# Altium PCB FPv1.3.2.PcbDoc (part 7 of 9)
Units mm, origin at the board's own origin, x right, y up, seen from the top; angles counter-clockwise.
Board outline 81.28 x 53.34 mm, 4 copper layers (Top Layer, GROUND PLANE, POWER PLANE, Bottom Layer); 98 components, 183 nets, 614 pads, 312 vias.
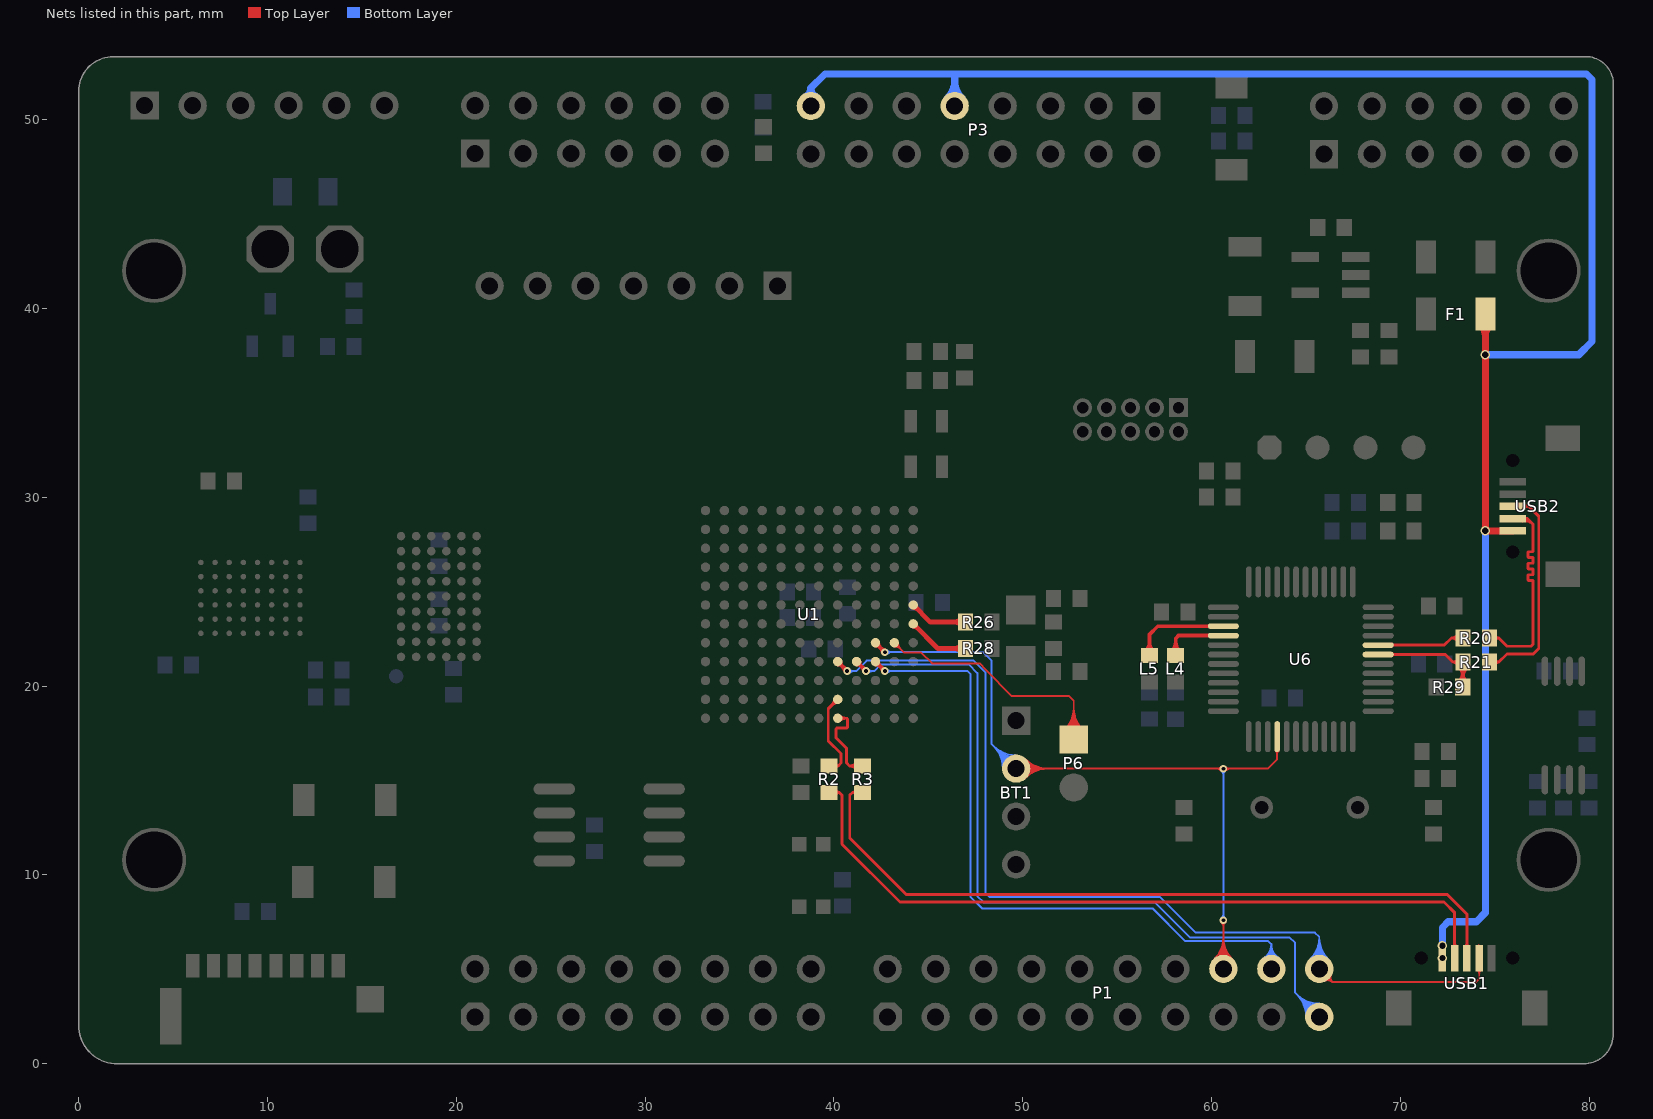
[diagram p9: the nets of this part, all layers, seen from the top]

## Via types
v1: diameter 0.403, hole 0.2, Top Layer to Bottom Layer, tented both sides, 261 vias
v2: diameter 0.503, hole 0.3, Top Layer to Bottom Layer, tented both sides, 25 vias
v3: diameter 0.6, hole 0.4, Top Layer to Bottom Layer, tented both sides, 11 vias
v4: diameter 0.508, hole 0.33, Top Layer to Bottom Layer, tented both sides, 5 vias
v5: diameter 0.703, hole 0.4, Top Layer to Bottom Layer, tented both sides, 3 vias
v6: diameter 0.603, hole 0.4, Top Layer to Bottom Layer, tented both sides, 2 vias
v7: diameter 0.503, hole 0.25, Top Layer to Bottom Layer, tented both sides, 2 vias
v8: diameter 0.6, hole 0.24, Top Layer to Bottom Layer, tented both sides, 1 vias
v9: diameter 0.508, hole 0.349, Top Layer to Bottom Layer, tented both sides, 1 vias
v10: diameter 0.603, hole 0.3, Top Layer to Bottom Layer, tented both sides, 1 vias

## Nets (pads, with @x,y where several pads share a name; then routed paths per layer and width w, separated by ;. In a path a pad name is that pad's centre, name@x,y a point inside that pad or via, vN(x,y) a via of type N, cw(c..) or ccw(c..) an arc to the next point about the centre after c; other vN are vias at no path point) (continued)
PTE25: BT1.2 P1.16 U1.K5 U6.40 | length 70.9
  Top Layer w0.102: U1.K5@42.2,22.101 cw(c42.2,21.62) 42.54,21.96 cw(c42.88,22.3) U1.K5@42.399,22.3 ; U1.K5@42.2,22.3 v1(42.7,21.8) ; U1.K5@42.295,22.101 cw(c42.018,21.621) v1@42.554,21.762 ; U1.K5@42.399,22.205 ccw(c42.879,22.482) v1@42.738,21.946 ; 42.506,21.98 cw(c42.349,21.708) v1@42.653,21.788 ; 42.511,21.977 cw(c42.458,21.885) v1@42.558,21.85 ; 42.52,21.994 ccw(c42.792,22.151) v1@42.712,21.847 ; 42.523,21.989 ccw(c42.615,22.042) v1@42.65,21.942 ; v1@42.549,21.8 ccw(c42.185,21.8) 42.443,22.057 ccw(c42.7,22.315) v1@42.7,21.951 ; BT1.2@49.65,15.46 49.825,15.635 62.985,15.635 63.475,16.125 U6.40@63.475,17.325 ; BT1.2@49.929,15.356 cw(c50.602,14.683) 50.602,15.635 cw(c50.602,16.587) BT1.2@49.929,15.914 ; BT1.2@50.001,15.284 cw(c50.847,14.438) 50.847,15.635 cw(c50.847,16.832) BT1.2@50.001,15.986 ; BT1.2@50.073,15.212 cw(c51.093,14.192) 51.093,15.635 cw(c51.093,17.078) BT1.2@50.073,16.058 ; BT1.2@50.144,15.141 cw(c51.338,13.947) 51.338,15.635 cw(c51.338,17.323) BT1.2@50.144,16.129 ; P1.16@60.131,5.519 ccw(c58.937,6.713) 60.625,6.713 ccw(c62.313,6.713) P1.16@61.119,5.519 ; P1.16@60.202,5.448 ccw(c59.182,6.468) 60.625,6.468 ccw(c62.068,6.468) P1.16@61.048,5.448 ; 60.237,15.635 cw(c60.237,15.237) v1@60.518,15.518 ; P1.16@60.274,5.376 ccw(c59.428,6.222) 60.625,6.222 ccw(c61.822,6.222) P1.16@60.976,5.376 ; 60.285,15.635 ccw(c60.285,15.965) v1@60.518,15.732 ; P1.16@60.346,5.304 ccw(c59.673,5.977) 60.625,5.977 ccw(c61.577,5.977) P1.16@60.904,5.304 ; v1@60.518,7.493 cw(c60.261,7.236) 60.625,7.236 cw(c60.989,7.236) v1@60.732,7.493 ; P1.16@60.625,5.025 v1(60.625,7.6) ; v1@60.732,15.518 cw(c61.013,15.237) 61.013,15.635 ; v1@60.732,15.732 ccw(c60.965,15.965) 60.965,15.635 ; U6.40@63.405,16.58 cw(c63.236,16.411) 63.475,16.411 cw(c63.714,16.411) U6.40@63.545,16.58 ; 42.537,21.962 ccw(c42.619,22.104) 42.661,21.946 cw(c42.619,22.104) 42.537,21.962 ; 42.538,21.963 cw(c42.396,21.881) 42.554,21.839 ccw(c42.396,21.881) 42.538,21.963
  Bottom Layer w0.102: v1(42.7,21.8) 47.898,21.8 48.35,21.348 48.35,16.935 BT1.2@49.65,15.635 ; v1@42.807,21.693 cw(c43.064,21.436) 43.064,21.8 cw(c43.064,22.164) v1@42.807,21.907 ; BT1.2@48.951,15.635 ccw(c47.263,15.635) 48.456,16.829 ccw(c49.65,18.022) BT1.2@49.65,16.334 ; BT1.2@49.052,15.635 ccw(c47.61,15.635) 48.63,16.655 ccw(c49.65,17.675) BT1.2@49.65,16.233 ; BT1.2@49.154,15.635 ccw(c47.957,15.635) 48.803,16.482 ccw(c49.65,17.328) BT1.2@49.65,16.131 ; BT1.2@49.256,15.635 ccw(c48.303,15.635) 48.977,16.308 ccw(c49.65,16.982) BT1.2@49.65,16.029 ; v1@60.518,7.707 ccw(c60.261,7.964) 60.625,7.964 ccw(c60.989,7.964) v1@60.732,7.707 ; v1@60.518,15.518 cw(c60.261,15.261) 60.625,15.261 cw(c60.989,15.261) v1@60.732,15.518 ; v1(60.625,7.6) v1(60.625,15.625)
PTE26: P1.18 U1.K4 | length 43.9
  Top Layer w0.102: U1.K4@42.2,21.101 cw(c42.2,20.62) 42.54,20.96 cw(c42.88,21.3) U1.K4@42.399,21.3 ; U1.K4@42.2,21.3 v1(42.7,20.8) ; U1.K4@42.295,21.101 cw(c42.018,20.621) v1@42.554,20.762 ; U1.K4@42.399,21.205 ccw(c42.879,21.482) v1@42.738,20.946 ; 42.506,20.98 cw(c42.349,20.708) v1@42.653,20.788 ; 42.511,20.977 cw(c42.458,20.885) v1@42.558,20.85 ; 42.52,20.994 ccw(c42.792,21.151) v1@42.712,20.847 ; 42.523,20.989 ccw(c42.615,21.042) v1@42.65,20.942 ; v1@42.549,20.8 ccw(c42.185,20.8) 42.443,21.057 ccw(c42.7,21.315) v1@42.7,20.951 ; 42.537,20.962 ccw(c42.619,21.104) 42.661,20.946 cw(c42.619,21.104) 42.537,20.962 ; 42.538,20.963 cw(c42.396,20.881) 42.554,20.839 ccw(c42.396,20.881) 42.538,20.963
  Bottom Layer w0.102: v1(42.7,20.8) 47.081,20.8 47.225,20.656 47.225,8.85 47.85,8.225 56.875,8.225 58.603,6.497 63.003,6.497 63.165,6.335 ; v1@42.807,20.693 cw(c43.064,20.436) 43.064,20.8 cw(c43.064,21.164) v1@42.807,20.907 ; P1.18@62.776,5.606 ccw(c62.288,6.335) 63.165,6.335 ; P1.18@62.832,5.521 ccw(c62.415,6.145) 63.165,6.145 ccw(c63.915,6.145) P1.18@63.498,5.521 ; P1.18@62.889,5.437 ccw(c62.543,5.954) 63.165,5.954 ccw(c63.787,5.954) P1.18@63.441,5.437 ; P1.18@63.165,5.025 63.165,6.335 ; P1.18@63.554,5.606 cw(c64.042,6.335) 63.165,6.335
PTE27: P1.19 U1.J4 | length 53.4
  Top Layer w0.102: U1.J4@41.2,21.101 cw(c41.2,20.62) 41.54,20.96 cw(c41.88,21.3) U1.J4@41.399,21.3 ; U1.J4@41.2,21.3 v1(41.7,20.8) ; U1.J4@41.295,21.101 cw(c41.018,20.621) v1@41.554,20.762 ; U1.J4@41.399,21.205 ccw(c41.879,21.482) v1@41.738,20.946 ; 41.506,20.98 cw(c41.349,20.708) v1@41.653,20.788 ; 41.511,20.977 cw(c41.458,20.885) v1@41.558,20.85 ; 41.52,20.994 ccw(c41.792,21.151) v1@41.712,20.847 ; 41.523,20.989 ccw(c41.615,21.042) v1@41.65,20.942 ; v1@41.549,20.8 ccw(c41.185,20.8) 41.443,21.057 ccw(c41.7,21.315) v1@41.7,20.951 ; 41.537,20.962 ccw(c41.619,21.104) 41.661,20.946 cw(c41.619,21.104) 41.537,20.962 ; 41.538,20.963 cw(c41.396,20.881) 41.554,20.839 ccw(c41.396,20.881) 41.538,20.963
  Bottom Layer w0.102: v1(41.7,20.8) 42.136,20.8 42.49,21.154 47.138,21.154 47.6,20.692 47.6,8.875 47.925,8.55 57,8.55 58.85,6.7 64.125,6.7 64.425,6.4 64.425,3.765 P1.19@65.705,2.485 ; v1@41.807,20.693 cw(c42.064,20.436) 42.064,20.8 cw(c42.064,21.164) v1@41.807,20.907 ; P1.19@65.006,2.485 ccw(c63.318,2.485) 64.511,3.679 ccw(c65.705,4.872) P1.19@65.705,3.184 ; P1.19@65.107,2.485 ccw(c63.665,2.485) 64.685,3.505 ccw(c65.705,4.525) P1.19@65.705,3.083 ; P1.19@65.209,2.485 ccw(c64.012,2.485) 64.858,3.332 ccw(c65.705,4.178) P1.19@65.705,2.981 ; P1.19@65.311,2.485 ccw(c64.358,2.485) 65.032,3.158 ccw(c65.705,3.832) P1.19@65.705,2.879
PTE28: P1.20 U1.H4 USB1.4 | length 65.7
  Top Layer w0.102: U1.H4@40.2,21.101 cw(c40.2,20.62) 40.54,20.96 cw(c40.88,21.3) U1.H4@40.399,21.3 ; U1.H4@40.2,21.3 v1(40.7,20.8) ; U1.H4@40.295,21.101 cw(c40.018,20.621) v1@40.554,20.762 ; U1.H4@40.399,21.205 ccw(c40.879,21.482) v1@40.738,20.946 ; 40.506,20.98 cw(c40.349,20.708) v1@40.653,20.788 ; 40.511,20.977 cw(c40.458,20.885) v1@40.558,20.85 ; 40.52,20.994 ccw(c40.792,21.151) v1@40.712,20.847 ; 40.523,20.989 ccw(c40.615,21.042) v1@40.65,20.942 ; v1@40.549,20.8 ccw(c40.185,20.8) 40.443,21.057 ccw(c40.7,21.315) v1@40.7,20.951 ; P1.20@65.705,5.025 66.405,4.325 ; P1.20@65.962,4.485 cw(c66.091,4.215) 66.303,4.427 cw(c66.515,4.639) P1.20@66.245,4.768 ; P1.20@66.006,4.394 cw(c66.157,4.077) 66.405,4.325 ; P1.20@66.336,4.724 ccw(c66.653,4.573) 66.405,4.325 ; USB1.4@74.069,4.995 cw(c73.815,4.74) 74.175,4.74 cw(c74.535,4.74) USB1.4@74.28,4.995 ; USB1.4@74.15,5.6 74.15,6.3 ; USB1.4@74.175,5.6 74.175,4.5 74,4.325 66.405,4.325 ; 40.537,20.962 ccw(c40.619,21.104) 40.661,20.946 cw(c40.619,21.104) 40.537,20.962 ; 40.538,20.963 cw(c40.396,20.881) 40.554,20.839 ccw(c40.396,20.881) 40.538,20.963
  Bottom Layer w0.102: v1(40.7,20.8) 41.171,20.8 41.728,21.357 47.401,21.357 48.025,20.733 48.025,9.05 48.25,8.825 57.275,8.825 59.15,6.95 65.475,6.95 65.705,6.72 P1.20@65.705,5.025 ; v1@40.807,20.693 cw(c41.064,20.436) 41.064,20.8 cw(c41.064,21.164) v1@40.807,20.907 ; P1.20@65.211,5.519 ccw(c64.017,6.713) 65.705,6.713 ccw(c67.393,6.713) P1.20@66.199,5.519 ; P1.20@65.282,5.448 ccw(c64.262,6.468) 65.705,6.468 ccw(c67.148,6.468) P1.20@66.128,5.448 ; P1.20@65.354,5.376 ccw(c64.508,6.222) 65.705,6.222 ccw(c66.902,6.222) P1.20@66.056,5.376 ; P1.20@65.426,5.304 ccw(c64.753,5.977) 65.705,5.977 ccw(c66.657,5.977) P1.20@65.984,5.304
RTC_WAKE: P6.1 U1.L5 | length 21.9
  Top Layer w0.102: U1.L5@43.2,22.101 cw(c43.2,21.62) 43.54,21.96 cw(c43.88,22.3) U1.L5@43.399,22.3 ; U1.L5@43.2,22.3 43.725,21.775 44.625,21.775 45.2,21.2 47.712,21.2 48.032,20.88 48.032,20.868 49.425,19.475 52.45,19.475 52.7,19.225 P6.1@52.7,17.175 ; P6.1@52.206,17.669 ccw(c51.012,18.863) 52.7,18.863 ccw(c54.388,18.863) P6.1@53.194,17.669 ; P6.1@52.277,17.598 ccw(c51.257,18.618) 52.7,18.618 ccw(c54.143,18.618) P6.1@53.123,17.598 ; P6.1@52.349,17.526 ccw(c51.503,18.372) 52.7,18.372 ccw(c53.897,18.372) P6.1@53.051,17.526 ; P6.1@52.421,17.454 ccw(c51.748,18.127) 52.7,18.127 ccw(c53.652,18.127) P6.1@52.979,17.454
RTCX1: R28.2 U1.M6 | length 4.8
  Top Layer w0.254: U1.M6@44.2,23.177 cw(c44.2,22.88) 44.41,23.09 cw(c44.62,23.3) U1.M6@44.323,23.3 ; U1.M6@44.2,23.3 45.505,21.995 R28.2@46.979,21.995 ; R28.2@46.786,21.802 ccw(c46.32,21.336) 46.32,21.995 ccw(c46.32,22.654) R28.2@46.786,22.188
RTCX2: R26.2 U1.M7 | length 4.7
  Top Layer w0.254: U1.M7@44.2,24.177 cw(c44.2,23.88) 44.41,24.09 cw(c44.62,24.3) U1.M7@44.323,24.3 ; U1.M7@44.2,24.3 45.108,23.392 R26.2@46.979,23.392 ; R26.2@46.786,23.199 ccw(c46.32,22.733) 46.32,23.392 ccw(c46.32,24.051) R26.2@46.786,23.585
RXD_LED: L4.2 U6.28 | length 4.6
  Top Layer w0.203: L4.2@57.889,21.836 ccw(c57.38,22.345) 58.1,22.345 ccw(c58.82,22.345) L4.2@58.311,21.836 ; L4.2@58.1,21.625 58.1,22.525 58.25,22.675 U6.28@60.625,22.675
TXD_LED: L5.2 U6.27 | length 6.3
  Top Layer w0.203: L5.2@56.498,21.84 ccw(c55.989,22.349) 56.709,22.349 ccw(c57.429,22.349) L5.2@56.92,21.84 ; L5.2@56.709,21.629 56.709,22.734 57.15,23.175 U6.27@60.625,23.175
USB0D_N: R20.2 U6.8 | length 5.8
  Top Layer w0.152: U6.8@68.825,22.175 72.325,22.175 72.7,22.55 ; U6.8@69.552,22.123 cw(c69.678,21.997) 69.678,22.175 cw(c69.678,22.353) U6.8@69.552,22.227 ; R20.2@73.06,22.363 ccw(c72.7,22.109) 72.7,22.55 ; R20.2@73.06,22.737 cw(c72.7,22.991) 72.7,22.55 ; R20.2@73.325,22.55 72.7,22.55
  Top Layer w0.203: R20.2@73.275,22.55 R20.2@73.325,22.5
USB0D_P: R21.2 R29.1 U6.7 | length 10.4
  Top Layer w0.152: U6.7@68.825,21.675 72.375,21.675 72.775,21.275 ; U6.7@69.552,21.623 cw(c69.678,21.497) 69.678,21.675 cw(c69.678,21.853) U6.7@69.552,21.727 ; R21.2@73.042,21.118 ccw(c72.775,20.97) 72.775,21.275 ; R21.2@73.042,21.432 cw(c72.775,21.58) 72.775,21.275 ; R29.1@73.071,20.229 ccw(c72.518,20.782) 73.3,20.782 ccw(c74.082,20.782) R29.1@73.529,20.229 ; R21.2@73.096,20.996 cw(c72.604,20.504) 73.3,20.504 ; R29.1@73.179,20.121 ccw(c72.886,20.414) 73.3,20.414 ccw(c73.714,20.414) R29.1@73.421,20.121 ; R29.1@73.3,20.383 cw(c74.167,20.383) R21.2@73.554,20.996 ; 73.3,20.751 cw(c73.799,20.751) R21.2@73.446,21.104 ; R21.2@73.3,21.25 R29.1@73.3,19.95 R29.1@73.325,19.975 ; R21.2@73.325,21.275 72.775,21.275
USB0R_N: R20.1 USB2.2 | length 13.3
  Top Layer w0.152: R20.1@74.725,22.55 75.212,22.55 ; R20.1@75.024,22.425 cw(c75.212,22.345) 75.212,22.55 ; R20.1@75.024,22.675 ccw(c75.212,22.755) 75.212,22.55 ; USB2.2@75.95,28.875 76.725,28.875 ; USB2.2@76.445,28.903 cw(c76.517,28.491) 76.813,28.787 ; USB2.2@76.471,28.753 cw(c76.579,28.139) 77.02,28.58 ; USB2.2@76.543,28.793 cw(c76.725,28.631) 76.725,28.875 ; USB2.2@76.543,28.957 ccw(c76.725,29.119) 76.725,28.875 ; 75.212,22.55 75.646,22.116 76.916,22.116 77.02,22.22 77.02,25.55 77.02,25.563 ccw(c76.99,25.563) 76.99,25.594 76.797,25.594 cw(c76.797,25.624) 76.766,25.624 76.766,25.868 cw(c76.797,25.868) 76.797,25.899 76.99,25.899 ccw(c76.99,25.929) 77.02,25.929 77.02,26.173 ccw(c76.99,26.173) 76.99,26.203 76.797,26.203 cw(c76.797,26.234) 76.766,26.234 76.766,26.478 cw(c76.797,26.478) 76.797,26.508 76.99,26.508 ccw(c76.99,26.539) 77.02,26.539 77.02,26.783 ccw(c76.99,26.783) 76.99,26.813 76.797,26.813 cw(c76.797,26.843) 76.766,26.843 76.766,27.087 cw(c76.797,27.087) 76.797,27.118 76.99,27.118 ccw(c76.99,27.148) 77.02,27.148 77.02,27.423 77.02,27.575 77.02,28.58 ; 76.725,28.875 77.02,28.58
USB0R_P: R21.1 USB2.3 | length 12.4
  Top Layer w0.152: R21.1@74.725,21.275 75.212,21.275 ; R21.1@75.024,21.15 cw(c75.212,21.07) 75.212,21.275 ; R21.1@75.024,21.4 ccw(c75.212,21.48) 75.212,21.275 ; USB2.3@75.95,29.525 76.8,29.525 77.325,29 77.325,22 77.034,21.709 75.646,21.709 75.212,21.275 ; USB2.3@76.538,29.437 cw(c76.749,29.226) 76.749,29.525 cw(c76.749,29.824) USB2.3@76.538,29.613
USB1D_N: R2.1 U1.H2 | length 5.5
  Top Layer w0.152: R2.1@39.75,15.775 40.225,15.775 ; U1.H2@40.026,19.3 cw(c39.607,19.3) 39.903,19.003 cw(c40.2,18.707) U1.H2@40.2,19.126 ; R2.1@40.112,15.689 cw(c40.225,15.658) 40.225,15.775 ; R2.1@40.112,15.861 ccw(c40.225,15.892) 40.225,15.775 ; U1.H2@40.2,19.3 39.7,18.8 39.7,17.1 40.375,16.425 40.375,15.925 40.225,15.775
USB1D_P: R3.1 U1.H1 | length 6.1
  Top Layer w0.152: U1.H1@40.2,18.3 40.675,18.3 40.725,18.25 40.725,17.825 40.675,17.775 40.15,17.775 40.106,17.731 40.106,17.269 40.675,16.7 40.675,15.925 40.825,15.775 ; U1.H1@40.323,18.177 cw(c40.62,17.88) 40.62,18.3 cw(c40.62,18.72) U1.H1@40.323,18.423 ; R3.1@41.217,15.58 ccw(c40.825,15.285) 40.825,15.775 ; R3.1@41.217,15.97 cw(c40.825,16.265) 40.825,15.775 ; R3.1@41.525,15.775 40.825,15.775
USBPD_N: R2.2 USB1.2 | length 40.6
  Top Layer w0.152: R2.2@39.75,14.375 40.285,14.375 ; R2.2@40.099,14.251 cw(c40.285,14.173) 40.285,14.375 ; R2.2@40.099,14.499 ccw(c40.285,14.577) 40.285,14.375 ; USB1.2@72.787,6.188 ccw(c72.576,6.399) 72.875,6.399 ccw(c73.174,6.399) USB1.2@72.963,6.188 ; USB1.2@72.875,5.6 72.875,8 72.307,8.569 43.497,8.569 40.434,11.632 40.434,14.226 40.285,14.375
USBPD_P: R3.2 USB1.3 | length 40.7
  Top Layer w0.152: R3.2@41.177,14.248 ccw(c40.985,14.167) 40.985,14.375 ; R3.2@41.177,14.502 cw(c40.985,14.583) 40.985,14.375 ; R3.2@41.525,14.375 40.985,14.375 ; USB1.3@73.437,6.188 ccw(c73.226,6.399) 73.525,6.399 ccw(c73.824,6.399) USB1.3@73.613,6.188 ; USB1.3@73.525,5.6 73.525,7.925 72.475,8.975 43.825,8.975 40.841,11.959 40.841,14.23 40.985,14.375
VCC: F1.1 P3.9 P3.15 USB1.1 USB2.1 | length 106.1
  Top Layer w0.381: F1.1@74.263,39.113 cw(c73.692,38.542) 74.5,38.542 cw(c75.308,38.542) F1.1@74.737,39.113 ; F1.1@74.5,39.7 v4(74.5,28.225) USB2.1@75.95,28.225
  Bottom Layer w0.381: P3.15@38.504,51.214 ccw(c38.248,51.676) 38.776,51.676 ; P3.15@38.776,50.725 38.776,51.676 ; P3.15@39.048,51.214 cw(c39.304,51.676) 38.776,51.676 ; P3.9@46,51.121 ccw(c45.045,52.076) 46.396,52.076 ccw(c47.747,52.076) P3.9@46.792,51.121 ; P3.9@46.396,50.725 46.396,52.396 ; v4(72.225,5.6) v4(72.225,6.25) 72.225,7.225 72.525,7.525 74.025,7.525 74.5,8 v4(74.5,28.225) ; v4(74.5,37.55) 79.45,37.55 80.15,38.25 80.15,52.125 79.85,52.425 39.525,52.425 38.776,51.676
pads on no net: P3.1 SD*2.0 U1.A10 U1.B10 U1.C10 U1.M5 U3.A2 U3.A5 U3.B3 U3.B4 U3.H3 U3.H4 U3.J2 U3.J5 U4.E3 U4.H6 U6.29 U6.30 U6.32 U6.33 U6.35 U6.36 U6.37 U6.38 U6.41 USB1.0 USB1.6 USB1.7 USB2.0 USB2.4 USB2.6 USB2.7 XTAL1.1
copper on no net: | length 727.9